# Altium PCB PCB1.PcbDoc (part 2 of 3)
Units mil, origin at the board's own origin, x right, y up, seen from the top; angles counter-clockwise.
Board outline 3935 x 3335 mil, 2 copper layers (Top Layer, Bottom Layer); 149 components, 220 nets, 928 pads, 357 vias.
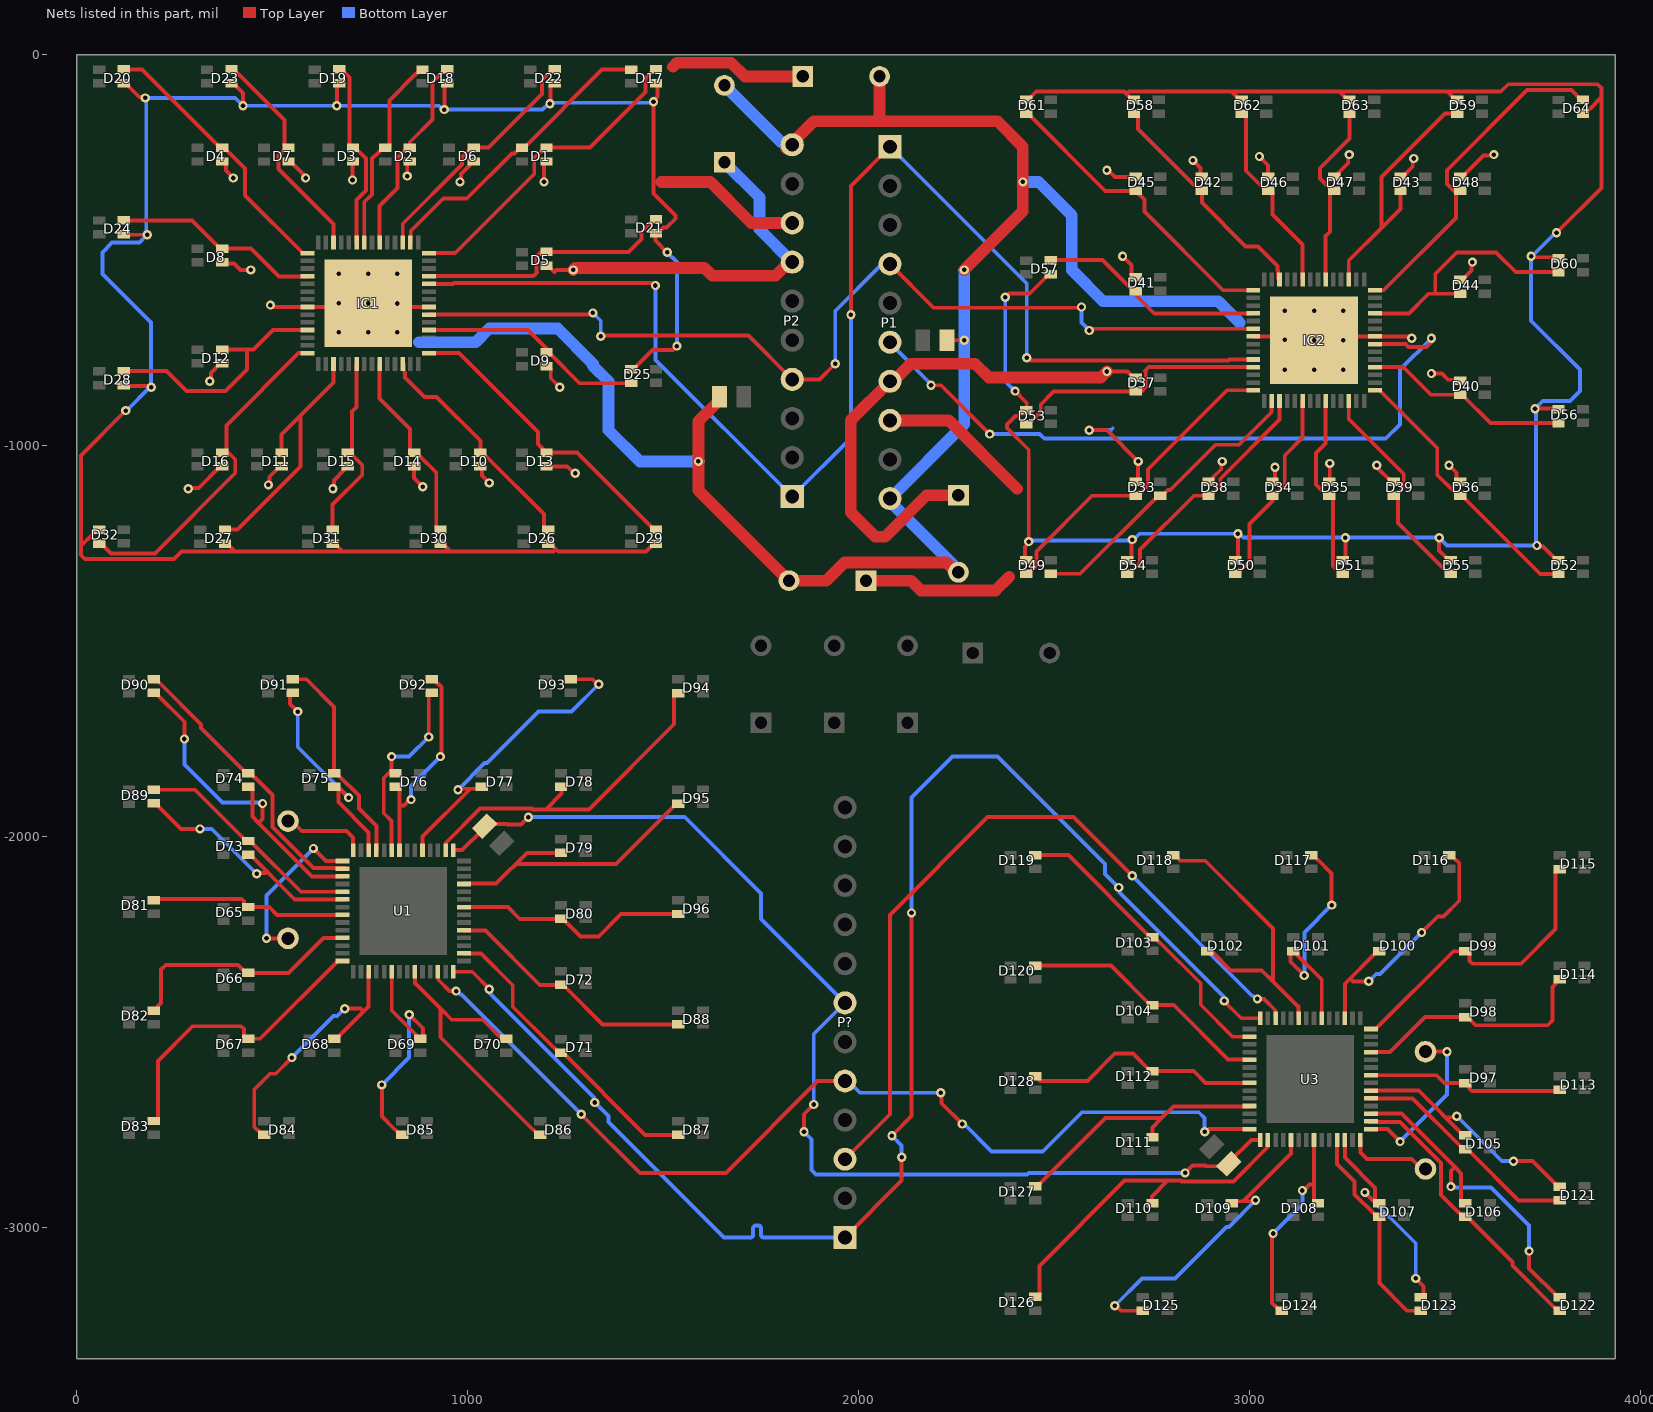
[diagram p2: the nets of this part, all layers, seen from the top]

## Via types
v1: diameter 23.62, hole 11.81, Top Layer to Bottom Layer, 357 vias

## Nets (pads, with @x,y where several pads share a name; then routed paths per layer and width w, separated by ;. In a path a pad name is that pad's centre, name@x,y a point inside that pad or via, vN(x,y) a via of type N, cw(c..) or ccw(c..) an arc to the next point about the centre after c; other vN are vias at no path point) (continued)
1_OUTG12_1: D76.2 D92.2 U1.51 | length 489.1
  Top Layer w10: U1.51@805,-2035 805,-1960 785,-1940 785,-1850 805,-1830 v1(805,-1795) ; v1(900,-1745) 900,-1638.11 905.83,-1632.28 D92.2@907.5,-1632.28
  Bottom Layer w10: v1(805,-1795) 850,-1795 v1(900,-1745)
1_OUTG13: D107.2 D123.2 U3.54 | length 564
  Top Layer w10: U3.54@3243.58,-2775.51 3243.58,-2820.83 3321.13,-2898.38 D107.2@3321.13,-2931.89 ; v1(3295,-2910) 3316.89,-2931.89 D107.2@3321.13,-2931.89 ; D107.2@3331.88,-2937.72 3326.06,-2931.89 D107.2@3321.13,-2931.89 ; v1(3425,-3130) 3445,-3150 D123.2@3445,-3175
  Bottom Layer w10: v1(3295,-2910) 3425,-3040 v1(3425,-3130)
1_OUTG13_1: D75.2 D91.2 U1.54 | length 564
  Top Layer w10: D91.2@545,-1635 545,-1660 v1(565,-1680) ; D75.2@658.12,-1872.28 663.94,-1878.11 D75.2@668.87,-1878.11 ; v1(695,-1900) 673.11,-1878.11 D75.2@668.87,-1878.11 ; U1.54@746.42,-2034.49 746.42,-1989.17 668.87,-1911.62 D75.2@668.87,-1878.11
  Bottom Layer w10: v1(565,-1680) 565,-1770 v1(695,-1900)
1_OUTG14: D106.2 D122.2 U3.3 | length 888.3
  Top Layer w10: U3.3@3310.51,-2708.58 3388.58,-2708.58 3525,-2845 ; v1(3515,-2895) 3515,-2855 3525,-2845 ; D106.2@3550,-2935 3544.37,-2935 3541.26,-2931.89 3541.26,-2861.26 3525,-2845 ; v1(3715,-3060) 3715,-3104.13 3788.58,-3177.72 D122.2@3793.5,-3177.72
  Bottom Layer w10: v1(3515,-2895) 3517.61,-2897.61 3617.61,-2897.61 3715,-2995 v1(3715,-3060)
1_OUTG14_1: D74.2 D90.2 U1.3 | length 888.3
  Top Layer w10: D90.2@196.5,-1632.28 201.42,-1632.28 275,-1705.87 v1(275,-1750) ; D74.2@440,-1875 445.63,-1875 448.74,-1878.11 448.74,-1948.74 465,-1965 ; v1(475,-1915) 475,-1955 465,-1965 ; U1.3@679.49,-2101.42 601.42,-2101.42 465,-1965
  Bottom Layer w10: v1(275,-1750) 275,-1815 372.39,-1912.39 472.39,-1912.39 v1(475,-1915)
1_OUTG15: D105.2 D121.2 U3.6 | length 659.8
  Top Layer w10: U3.6@3305,-2650 3305.47,-2649.53 U3.6@3310.51,-2649.53 3432.65,-2649.53 3547.09,-2763.97 D105.2@3552.01,-2763.97 ; 3505,-2720 3507.39,-2717.61 3527.39,-2717.61 v1(3530,-2715) ; v1(3675,-2830) 3723.37,-2830 3788.58,-2895.22 D121.2@3793.5,-2895.22
  Bottom Layer w10: v1(3530,-2715) 3645,-2830 v1(3675,-2830)
1_OUTG15_1: D73.2 D89.2 U1.6 | length 659.8
  Top Layer w10: D89.2@196.5,-1914.78 201.42,-1914.78 266.63,-1980 v1(315,-1980) ; D73.2@437.99,-2046.03 442.91,-2046.03 557.35,-2160.47 U1.6@679.49,-2160.47 684.53,-2160.47 U1.6@685,-2160 ; v1(460,-2095) 462.61,-2092.39 482.61,-2092.39 485,-2090
  Bottom Layer w10: v1(315,-1980) 345,-1980 v1(460,-2095)
1_OUTR0: D97.1 D113.1 U3.8 | length 504.1
  Top Layer w10: U3.8@3315,-2610 3315.16,-2610.16 3477.92,-2610.16 3497.98,-2630.22 D97.1@3552.01,-2630.22 ; D97.1@3550,-2630 3556.71,-2630 3562.76,-2636.04 3562.76,-2644.84 3568.96,-2651.04 3790.18,-2651.04 D113.1@3793.5,-2647.72
1_OUTR0_1: D65.1 D81.1 U1.8 | length 504.1
  Top Layer w10: D81.1@196.5,-2162.28 199.82,-2158.96 421.04,-2158.96 427.24,-2165.16 427.24,-2173.96 433.29,-2180 D65.1@440,-2180 ; D65.1@437.99,-2179.78 492.02,-2179.78 512.08,-2199.84 674.84,-2199.84 U1.8@675,-2200
1_OUTR1: D98.1 D114.1 U3.11 | length 625.9
  Top Layer w10: U3.11@3310.51,-2551.1 3358.9,-2551.1 3448.53,-2461.47 3543.53,-2461.47 D98.1@3545,-2460 ; D98.1@3552.01,-2461.47 3556.93,-2461.47 3577.76,-2482.29 3762.71,-2482.29 3775,-2470 3775,-2385 3782.76,-2377.24 3782.76,-2371.04 3788.8,-2365 D114.1@3795,-2365
1_OUTR1_1: D66.1 D82.1 U1.11 | length 625.9
  Top Layer w10: D82.1@195,-2445 201.2,-2445 207.24,-2438.96 207.24,-2432.76 215,-2425 215,-2340 227.29,-2327.71 412.24,-2327.71 433.07,-2348.53 D66.1@437.99,-2348.53 ; D66.1@445,-2350 446.47,-2348.53 541.47,-2348.53 631.1,-2258.9 U1.11@679.49,-2258.9
1_OUTR2: D99.1 D115.1 U3.14 | length 769.1
  Top Layer w10: U3.14@3310.51,-2492.05 3322.32,-2492.05 3521.26,-2293.11 D99.1@3548.11,-2293.11 ; D99.1@3555,-2295 3559.21,-2295 3562.76,-2298.54 3562.76,-2317.76 3570,-2325 3694.14,-2325 3782.76,-2236.39 3782.76,-2088.54 3788.58,-2082.72 D115.1@3793.5,-2082.72
1_OUTR2_1: D67.1 D83.1 U1.14 | length 769.1
  Top Layer w10: D83.1@196.5,-2727.28 201.42,-2727.28 207.24,-2721.46 207.24,-2573.61 295.86,-2485 420,-2485 427.24,-2492.24 427.24,-2511.46 430.79,-2515 D67.1@435,-2515 ; D67.1@441.89,-2516.89 468.74,-2516.89 667.68,-2317.95 U1.14@679.49,-2317.95
1_OUTR3: D100.1 D116.1 U3.17 | length 702.4
  Top Layer w10: U3.17@3243.58,-2464.49 3243.58,-2376.09 3325,-2294.68 D100.1@3325,-2290 ; 3260,-2365 3265,-2370 v1(3305,-2370) ; v1(3440,-2245) 3481.3,-2203.7 3496.3,-2203.7 3536.24,-2163.76 3536.24,-2067.31 3529.17,-2060.24 3528.38,-2060.24 3515.42,-2047.28 D116.1@3510.5,-2047.28
  Bottom Layer w10: v1(3305,-2370) 3323.96,-2351.04 3333.96,-2351.04 v1(3440,-2245)
1_OUTR3_1: D68.1 D84.1 U1.17 | length 702.4
  Top Layer w10: D84.1@479.5,-2762.72 474.58,-2762.72 461.62,-2749.76 460.83,-2749.76 453.76,-2742.69 453.76,-2646.24 493.7,-2606.3 508.7,-2606.3 v1(550,-2565) ; D68.1@665,-2520 665,-2515.32 746.42,-2433.91 U1.17@746.42,-2345.51 ; v1(685,-2440) 725,-2440 730,-2445
  Bottom Layer w10: v1(550,-2565) 656.04,-2458.96 666.04,-2458.96 v1(685,-2440)
1_OUTR4: D101.1 D117.1 U3.20 | length 646.8
  Top Layer w10: D101.1@3105,-2295 3105,-2320 v1(3140,-2355) ; D101.1@3111.76,-2292.72 3116.68,-2292.72 3122.5,-2298.54 3122.5,-2303.46 3184.53,-2365.49 U3.20@3184.53,-2464.49 3184.53,-2469.53 U3.20@3185,-2470 ; D117.1@3157.5,-2047.28 3162.42,-2047.28 3175.38,-2060.24 3176.17,-2060.24 3210,-2094.07 v1(3210,-2175)
  Bottom Layer w10: v1(3140,-2355) 3140,-2245 v1(3210,-2175)
1_OUTR4_1: D69.1 D85.1 U1.20 | length 646.8
  Top Layer w10: v1(780,-2635) 780,-2715.93 813.83,-2749.76 814.62,-2749.76 827.58,-2762.72 D85.1@832.5,-2762.72 ; U1.20@805,-2340 805.47,-2340.47 U1.20@805.47,-2345.51 805.47,-2444.51 867.5,-2506.54 867.5,-2511.46 873.32,-2517.28 D69.1@878.24,-2517.28 ; v1(850,-2455) 885,-2490 D69.1@885,-2515
  Bottom Layer w10: v1(780,-2635) 850,-2565 v1(850,-2455)
1_OUTR5: D102.1 D118.1 U3.23 | length 787.5
  Top Layer w10: D118.1@2804.5,-2047.28 2809.42,-2047.28 2822.38,-2060.24 2822.38,-2061.46 2886.46,-2061.46 3060,-2235 3060,-2370.85 ; D102.1@2895,-2295 2905,-2295 2951.81,-2341.81 3030.97,-2341.81 3060,-2370.85 ; U3.23@3125.47,-2464.49 3124.57,-2463.58 3124.57,-2434.57 3121.81,-2431.81 3120.97,-2431.81 3060,-2370.85
1_OUTR5_1: D70.1 D86.1 U1.23 | length 750.4
  Top Layer w10: U1.23@864.53,-2345.51 865.43,-2346.42 865.43,-2375.43 868.19,-2378.19 869.03,-2378.19 930,-2439.15 ; D70.1@1095,-2515 1085,-2515 1038.19,-2468.19 959.03,-2468.19 930,-2439.15 ; D86.1@1185.5,-2762.72 1180.58,-2762.72 1167.62,-2749.76 1166.83,-2749.76 930,-2512.93 930,-2439.15
1_OUTR6: D103.1 D119.1 U3.30 | length 777.2
  Top Layer w10: D119.1@2451.5,-2047.28 2536.57,-2047.28 2749.29,-2260 D103.1@2755,-2260 ; D103.1@2751.5,-2257.28 2756.42,-2257.28 2769.38,-2270.24 2770.17,-2270.24 2874.92,-2375 2874.92,-2429.92 2956.73,-2511.73 U3.30@2999.49,-2511.73
1_OUTR6_1: D71.1 D87.1 U1.30 | length 777.2
  Top Layer w10: U1.30@990.51,-2298.27 1033.27,-2298.27 1115.08,-2380.08 1115.08,-2435 1219.83,-2539.76 1220.62,-2539.76 1233.58,-2552.72 D71.1@1238.5,-2552.72 ; D71.1@1235,-2550 1240.71,-2550 1453.43,-2762.72 D87.1@1538.5,-2762.72
1_OUTR7: D104.1 D120.1 U3.33 | length 646.1
  Top Layer w10: D120.1@2451.5,-2329.78 2645.32,-2329.78 2745.54,-2430 D104.1@2750,-2430 ; D104.1@2751.5,-2431.03 2806.03,-2431.03 2945,-2570 U3.33@3000,-2570
1_OUTR7_1: D72.1 D88.1 U1.33 | length 646.1
  Top Layer w10: U1.33@990,-2240 1045,-2240 1183.97,-2378.97 D72.1@1238.5,-2378.97 ; D72.1@1240,-2380 1244.46,-2380 1344.68,-2480.22 D88.1@1538.5,-2480.22
1_OUTR8: D112.1 D128.1 U3.36 | length 612.4
  Top Layer w10: D128.1@2451.5,-2612.28 2464.21,-2625 2585,-2625 2655,-2555 2701.79,-2555 2746.79,-2600 D112.1@2750,-2600 ; D112.1@2751.5,-2599.78 2857.02,-2599.78 2887.08,-2629.84 U3.36@2999.49,-2629.84 2999.84,-2629.84 U3.36@3000,-2630
1_OUTR8_1: D80.1 D96.1 U1.36 | length 601.9
  Top Layer w10: U1.36@990,-2180 990.16,-2180.16 U1.36@990.51,-2180.16 1102.92,-2180.16 1132.98,-2210.22 D80.1@1238.5,-2210.22 ; D80.1@1240,-2210 1243.21,-2210 1288.21,-2255 1335,-2255 1392.28,-2197.72 D96.1@1538.5,-2197.72
1_OUTR9: D111.1 D127.1 U3.39 | length 691.6
  Top Layer w10: D127.1@2451.5,-2894.78 2456.42,-2894.78 2631.2,-2720 2775,-2720 ; D111.1@2751.5,-2768.53 2751.5,-2743.5 2775,-2720 ; U3.39@3000,-2690 2805,-2690 2775,-2720
1_OUTR9_1: D79.1 D95.1 U1.39 | length 765.7
  Top Layer w10: U1.39@990,-2120 1072.52,-2120 1151.06,-2041.47 D79.1@1238.5,-2041.47 ; 1120,-2075 1125,-2070 1378.8,-2070 1533.58,-1915.22 D95.1@1538.5,-1915.22
1_OUTR10: D110.1 D126.1 U3.44 | length 891.4
  Top Layer w10: D126.1@2451.5,-3177.28 2456.42,-3177.28 2462.24,-3171.46 2462.24,-3097.76 2680,-2880 2790,-2880 ; D110.1@2745,-2935 2746.46,-2935 2750,-2931.46 2750,-2920 2790,-2880 ; U3.44@3046.73,-2775.51 3045.83,-2776.42 3045.83,-2794.5 2958.51,-2881.81 2825.97,-2881.81 2824.15,-2880 2790,-2880
1_OUTR10_1: D78.1 D94.1 U1.44 | length 891.4
  Top Layer w10: U1.44@943.27,-2034.49 944.17,-2033.58 944.17,-2015.5 1031.49,-1928.19 1164.03,-1928.19 1165.85,-1930 1200,-1930 ; D78.1@1245,-1875 1243.54,-1875 1240,-1878.54 1240,-1890 1200,-1930 ; D94.1@1538.5,-1632.72 1533.58,-1632.72 1527.76,-1638.54 1527.76,-1712.24 1310,-1930 1200,-1930
1_OUTR11: D109.1 D125.1 U3.47 | length 823.4
  Top Layer w10: v1(2655,-3200) 2658.69,-3200 2671.4,-3212.72 D125.1@2727,-3212.72 2727.72,-3212.72 D125.1@2730,-3215 ; D109.1@2954.62,-2937.28 2959.3,-2932.61 3012.39,-2932.61 v1(3015,-2930) ; 2984.76,-2931.46 3105.79,-2810.43 3105.79,-2775.79 U3.47@3105,-2775
  Bottom Layer w10: v1(2655,-3200) 2725,-3130 2809.15,-3130 2940.97,-2998.19 2946.81,-2998.19 v1(3015,-2930)
1_OUTR11_1: D77.1 D93.1 U1.47 | length 823.4
  Top Layer w10: U1.47@885,-2035 884.21,-2034.21 884.21,-1999.57 1005.24,-1878.54 ; v1(975,-1880) 977.61,-1877.39 1030.7,-1877.39 D77.1@1035.38,-1872.72 ; D93.1@1260,-1595 1262.28,-1597.28 D93.1@1263,-1597.28 1318.6,-1597.28 1331.31,-1610 v1(1335,-1610)
  Bottom Layer w10: v1(975,-1880) 1043.19,-1811.81 1049.03,-1811.81 1180.85,-1680 1265,-1680 v1(1335,-1610)
1_OUTR12: D108.1 D124.1 U3.50 | length 558.6
  Top Layer w10: v1(3060,-3015) 3060,-3018.69 3056.76,-3021.93 3056.76,-3192.69 3063.83,-3199.76 3064.62,-3199.76 3077.58,-3212.72 D124.1@3082.5,-3212.72 ; v1(3135,-2905) 3138.69,-2905 3153.69,-2890 3164.84,-2890 ; U3.50@3164.84,-2775.51 3164.84,-2890 ; 3165,-2890 3164.84,-2890 ; D108.1@3174.75,-2937.28 3170.67,-2937.28 3164.84,-2931.46 3164.84,-2890
  Bottom Layer w10: v1(3060,-3015) 3135,-2940 v1(3135,-2905)
1_OUTR12_1: D76.1 D92.1 U1.50 | length 558.6
  Top Layer w10: D76.1@815.25,-1872.72 819.33,-1872.72 825.16,-1878.54 825.16,-1920 ; 825,-1920 825.16,-1920 ; U1.50@825.16,-2034.49 825.16,-1920 ; v1(855,-1905) 851.31,-1905 836.31,-1920 825.16,-1920 ; D92.1@907.5,-1597.28 912.42,-1597.28 925.38,-1610.24 926.17,-1610.24 933.24,-1617.31 933.24,-1788.07 930,-1791.31 v1(930,-1795)
  Bottom Layer w10: v1(855,-1905) 855,-1870 v1(930,-1795)
1_OUTR13: D107.1 D123.1 U3.53 | length 552.1
  Top Layer w10: U3.53@3223.9,-2775.51 3223.9,-2837.68 3268.4,-2882.18 3268.4,-2914.95 3320.34,-2966.89 3321.89,-2966.89 D107.1@3330,-2975 ; D107.1@3331.88,-2972.72 3331.88,-3141.88 3402.72,-3212.72 3437.28,-3212.72 D123.1@3440,-3210
1_OUTR13_1: D75.1 D91.1 U1.53 | length 552.1
  Top Layer w10: D91.1@550,-1600 552.72,-1597.28 587.28,-1597.28 658.12,-1668.12 D75.1@658.12,-1837.28 ; D75.1@660,-1835 668.11,-1843.11 669.66,-1843.11 721.6,-1895.05 721.6,-1927.82 766.1,-1972.32 U1.53@766.1,-2034.49
1_OUTR14: D106.1 D122.1 U3.2 | length 743.9
  Top Layer w10: U3.2@3305,-2730 3385,-2730 3490,-2835 3490,-2916.43 3533.33,-2959.76 3534.13,-2959.76 3547.09,-2972.72 D106.1@3552.01,-2972.72 3556.93,-2972.72 3672.36,-3088.15 3672.36,-3097.29 3781.96,-3206.89 3786.89,-3206.89 D122.1@3795,-3215
1_OUTR14_1: D74.1 D90.1 U1.2 | length 743.9
  Top Layer w10: D90.1@195,-1595 203.11,-1603.11 208.04,-1603.11 317.64,-1712.71 317.64,-1721.85 433.07,-1837.28 D74.1@437.99,-1837.28 442.91,-1837.28 455.87,-1850.24 456.67,-1850.24 500,-1893.57 500,-1975 605,-2080 U1.2@685,-2080
1_OUTR15: D105.1 D121.1 U3.5 | length 598.5
  Top Layer w10: U3.5@3305,-2670 3305.79,-2669.21 U3.5@3310.51,-2669.21 3416.54,-2669.21 3540.46,-2793.14 3546.18,-2793.14 D105.1@3552.01,-2798.97 ; D105.1@3550,-2800 3557.96,-2800 3688.18,-2930.22 D121.1@3793.5,-2930.22
1_OUTR15_1: D73.1 D89.1 U1.5 | length 598.5
  Top Layer w10: D89.1@196.5,-1879.78 301.82,-1879.78 432.04,-2010 D73.1@440,-2010 ; D73.1@437.99,-2011.03 443.82,-2016.86 449.54,-2016.86 573.46,-2140.79 U1.5@679.49,-2140.79 684.21,-2140.79 U1.5@685,-2140
1_SCLK: P?.1 U1.28 U3.28 | length 3808.3
  Top Layer w10: U1.28@962.95,-2345.51 1011.36,-2345.51 1055,-2389.15 v1(1055,-2390) ; P?.1@1965,-3025 2110,-2880 v1(2110,-2820) ; v1(2085,-2765) 2135,-2715 v1(2135,-2195) ; v1(2935,-2420) 2935,-2420.85 2978.64,-2464.49 U3.28@3027.05,-2464.49
  Bottom Layer w10: v1(1055,-2390) 1055,-2400 1322.39,-2667.39 1322.39,-2677.39 v1(1325,-2680) 1360,-2715 1360,-2730 1655,-3025 1720,-3025 1723,-3025 ccw(c1723,-3018) 1730,-3018 1730,-3002 cw(c1737,-3002) 1737,-2995 1743,-2995 cw(c1743,-3002) 1750,-3002 1750,-3018 ccw(c1757,-3018) 1757,-3025 1765,-3025 P?.1@1965,-3025 ; v1(2085,-2765) 2110,-2790 v1(2110,-2820) ; v1(2135,-2195) 2135,-1900 2240,-1795 2355,-1795 2630,-2070 2630,-2095 v1(2665,-2130) 2667.61,-2132.61 2667.61,-2142.61 2935,-2410 v1(2935,-2420)
1_SIN: P?.3 U3.26 | length 1990.6
  Top Layer w10: P?.3@1960,-2820 1970,-2820 2080,-2710 2080,-2200 2330,-1950 2550,-1950 v1(2700,-2100) ; v1(3020,-2414.96) 3036.5,-2414.96 3065.51,-2443.98 3065.51,-2463.58 U3.26@3066.42,-2464.49
  Bottom Layer w10: v1(2700,-2100) 2700,-2100.85 3005.97,-2406.81 3008.16,-2406.81 3016.31,-2414.96 v1(3020,-2414.96)
1_SOUT: P?.5 U1.26 U3.42 | length 2580.2
  Top Layer w10: U1.26@923.58,-2345.51 924.49,-2346.42 924.49,-2366.02 953.5,-2395.04 v1(970,-2395.04) ; v1(1290,-2710) 1440,-2860 1660,-2860 1895,-2625 P?.5@1965,-2625 P?.5@1970,-2630 ; v1(2210,-2655) 2211.81,-2656.81 2211.81,-2681.81 v1(2265,-2735) ; v1(2885,-2755) 2888.69,-2755 2895.73,-2747.95 U3.42@2999.49,-2747.95
  Bottom Layer w10: v1(970,-2395.04) 973.69,-2395.04 981.84,-2403.19 984.03,-2403.19 1290,-2709.15 v1(1290,-2710) ; P?.5@1965,-2625 1973.18,-2625 2003.18,-2655 v1(2210,-2655) ; v1(2265,-2735) 2270,-2735 2340,-2805 2470.85,-2805 2570.85,-2705 2870,-2705 2885,-2720 v1(2885,-2755)
1_VCC: C9.2 C12.2 P?.7 U1.43 U3.43 | length 2936.1
  Top Layer w10: U1.43@962.95,-2034.49 985.51,-2034.49 C12.2@1040,-1980 ; C12.2@1043.01,-1973.01 1048.99,-1967.02 1101.38,-1967.02 1103.31,-1968.96 1136.04,-1968.96 v1(1155,-1950) ; v1(1860,-2755) 1860,-2710 v1(1885,-2685) ; v1(2835,-2860) 2853.96,-2841.04 2886.69,-2841.04 2888.62,-2842.98 2941.01,-2842.98 C9.2@2946.99,-2836.99 ; C9.2@2950,-2830 3004.49,-2775.51 U3.43@3027.05,-2775.51
  Bottom Layer w10: v1(1155,-1950) 1555,-1950 1750,-2145 1750,-2210 1955,-2415 P?.7@1955,-2430 ; v1(1860,-2755) 1878.96,-2773.96 1878.96,-2853.01 1890.47,-2864.53 2430.47,-2864.53 2435,-2860 v1(2835,-2860) ; v1(1885,-2685) 1885,-2505 1960,-2430 P?.7@1970,-2430
+VIN_1: C4.1 D1.4 D2.4 D3.4 D4.4 D5.4 D6.4 D7.4 D8.4 D9.4 D10.4 D11.4 D12.4 D13.4 D14.4 D15.4 D16.4 P2.7 | length 2002.9
  Top Layer w10: v1(285,-1110) 287.52,-1107.48 311.81,-1107.48 366.57,-1052.72 D16.4@371.5,-1052.72 ; v1(340,-835) 342.61,-832.39 342.61,-813.35 366.57,-789.38 D12.4@371.5,-789.38 ; D8.4@371.5,-531.05 374.5,-534.06 402.24,-534.06 418.19,-550 v1(445,-550) ; D4.4@371.5,-272.72 375.22,-272.72 381.04,-278.54 381.04,-296.04 v1(400,-315) ; v1(490,-1100) 492.61,-1097.39 492.61,-1079.08 518.97,-1052.72 D11.4@523.9,-1052.72 ; D7.4@541.5,-272.72 546.42,-272.72 582.39,-308.69 582.39,-312.39 v1(585,-315) ; v1(655,-1110) 657.61,-1107.39 657.61,-1088.41 682.55,-1063.46 682.55,-1058.54 688.37,-1052.72 D15.4@693.3,-1052.72 ; v1(705,-320) 705,-274.21 D3.4@706.5,-272.72 ; v1(845,-310) 845,-278.54 850.83,-272.72 D2.4@851.5,-272.72 ; D14.4@862.7,-1052.72 862.7,-1082.7 v1(885,-1105) ; v1(980,-325) 982.61,-322.39 982.61,-305.11 1004.25,-283.46 1004.25,-278.54 1010.08,-272.72 D6.4@1015,-272.72 ; D10.4@1032.1,-1052.72 1036.04,-1056.66 1036.04,-1076.04 v1(1055,-1095) ; v1(1195,-325) 1195,-278.54 1200.83,-272.72 D1.4@1201.5,-272.72 ; D13.4@1201.5,-1052.72 1254.37,-1052.72 1271.65,-1070 v1(1275,-1070) ; D9.4@1201.5,-796.05 1206.42,-796.05 1212.24,-801.88 1212.24,-827.24 v1(1235,-850) ; D5.4@1206.19,-534.69 D5.4@1201.5,-539.38 1206.42,-539.38 1222.03,-555 1227.03,-550 v1(1270,-550) ; P2.7@1825.31,-534.69 P2.7@1830,-530
  Top Layer w30: v1(1270,-550) 1275,-545 1605,-545 1625,-565 1787.14,-565 1822.14,-530 P2.7@1830,-530
  Bottom Layer w30: C4.1@1656.46,-274.89 1746.24,-364.67 1746.24,-446.24 P2.7@1830,-530 P2.7@1830,-540
+VIN_1_1: C1.1 D33.4 D34.4 D35.4 D36.4 D37.4 D38.4 D39.4 D40.4 D41.4 D42.4 D43.4 D44.4 D45.4 D46.4 D47.4 D48.4 P1.7 | length 2625.3
  Top Layer w10: v1(2590,-960) 2635,-960 v1(2715,-1040) 2715,-1086.46 2709.17,-1092.28 D33.4@2708.5,-1092.28 ; v1(2635,-810) 2687.97,-810 2703.58,-825.62 D37.4@2708.5,-825.62 D37.4@2703.81,-830.31 ; v1(2635,-295) 2638.35,-295 2655.63,-312.28 D45.4@2708.5,-312.28 ; v1(2675,-515) 2697.76,-537.76 2697.76,-563.12 2703.58,-568.95 D41.4@2708.5,-568.95 ; v1(2855,-270) 2873.96,-288.96 2873.96,-308.34 D42.4@2877.9,-312.28 ; D38.4@2895,-1092.28 2899.92,-1092.28 2905.75,-1086.46 2905.75,-1081.54 2927.39,-1059.89 2927.39,-1042.61 v1(2930,-1040) ; v1(3025,-260) 3047.3,-282.3 D46.4@3047.3,-312.28 ; D34.4@3058.5,-1092.28 3059.17,-1092.28 3065,-1086.46 v1(3065,-1055) ; D35.4@3203.5,-1092.28 3205,-1090.79 v1(3205,-1045) ; D47.4@3216.7,-312.28 3221.63,-312.28 3227.45,-306.46 3227.45,-301.54 3252.39,-276.59 3252.39,-257.61 v1(3255,-255) ; v1(3325,-1050) 3327.61,-1052.61 3327.61,-1056.31 3363.58,-1092.28 D39.4@3368.5,-1092.28 ; D43.4@3386.1,-312.28 3391.03,-312.28 3417.39,-285.92 3417.39,-267.61 v1(3420,-265) ; v1(3465,-815) 3491.81,-815 3507.76,-830.94 3535.5,-830.94 D40.4@3538.5,-833.95 ; v1(3510,-1050) 3528.96,-1068.96 3528.96,-1086.46 3534.78,-1092.28 D36.4@3538.5,-1092.28 ; D44.4@3538.5,-575.62 3543.43,-575.62 3567.39,-551.65 3567.39,-532.61 v1(3570,-530) ; D48.4@3538.5,-312.28 3543.43,-312.28 3598.19,-257.52 3622.48,-257.52 v1(3625,-255)
  Top Layer w30: P1.7@2085,-825 2085,-830 P1.7@2080,-835 ; C1.1@2255,-1126.57 2173.43,-1126.57 2067.43,-1232.57 2042.57,-1232.57 1980,-1170 1980,-935 P1.7@2080,-835 ; v1(2635,-810) 2620,-825 2332.5,-825 2297.5,-790 2132.86,-790 2087.86,-835 P1.7@2080,-835
  Bottom Layer w10: v1(2590,-960) 2645,-960 2650,-955
+VIN_2: C5.1 D17.4 D18.4 D19.4 D20.4 D21.4 D22.4 D23.4 D24.4 D25.4 D26.4 D27.4 D28.4 D29.4 D30.4 D31.4 D32.4 P2.8 | length 6483.1
  Top Layer w10: 13.15,-1253.15 37.12,-1229.17 37.48,-1229.17 51.65,-1215 D32.4@55,-1215 ; D28.4@120,-840 127.39,-847.39 187.39,-847.39 v1(190,-850) ; D24.4@120,-458.62 121.38,-460 v1(180,-460) ; D20.4@120,-72.72 124.92,-72.72 159.6,-107.39 172.39,-107.39 v1(175,-110) ; v1(125,-910) 10,-1025 10,-1280 20,-1290 248.27,-1290 267.44,-1270.83 404.45,-1270.83 ; D27.4@380,-1255 388.62,-1255 404.45,-1270.83 ; D23.4@395.7,-72.72 400.62,-72.72 425,-97.1 v1(425,-130) ; D31.4@654.4,-1250 659.32,-1250 680.15,-1270.83 ; v1(665,-130) 665,-78.54 670.83,-72.72 D19.4@671.4,-72.72 ; D30.4@930.1,-1250 935.02,-1250 955.85,-1270.83 ; v1(940,-140) 940,-78.54 945.83,-72.72 D18.4@947.1,-72.72 ; D26.4@1205,-1250 1210.72,-1250 1225.36,-1264.64 ; v1(1210,-125) 1212.05,-122.95 1212.05,-78.54 1220.59,-70 D22.4@1225,-70 ; D25.4@1418.5,-803.95 1423.43,-803.95 1472.37,-755 1525,-755 v1(1535,-745) ; D21.4@1480,-450 1480,-475 v1(1510,-505) ; D29.4@1481.5,-1250 1476.57,-1250 1455.75,-1270.83 1231.54,-1270.83 1225.36,-1264.64 ; D21.4@1481.5,-455 1487.47,-455 1501.02,-441.44 1508.56,-441.44 1530.86,-419.14 1530.86,-410.86 1475,-355 v1(1475,-120) 1475,-116.31 1485,-106.31 D17.4@1485,-75 ; 404.45,-1270.83 680.15,-1270.83 ; 680.15,-1270.83 955.85,-1270.83 ; 955.85,-1270.83 1219.17,-1270.83 1225.36,-1264.64
  Top Layer w30: 1495,-325 1620,-325 1725,-430 P2.8@1830,-430 ; 1525,-30 1535,-20 1673.29,-20 1708.29,-55 C5.1@1856.57,-55
  Bottom Layer w10: v1(125,-910) 127.5,-910 187.5,-850 v1(190,-850) 190,-685 65,-560 65,-505 90,-480 160,-480 v1(180,-460) 177.5,-457.5 177.5,-116.29 176.21,-115 v1@175,-115 ; v1(175,-110) 405,-110 v1(425,-130) v1(665,-130) 926.31,-130 936.31,-140 v1(940,-140) 1191.31,-140 1206.31,-125 v1(1210,-125) 1212.5,-122.5 1472.5,-122.5 v1(1475,-120) ; v1(1510,-505) 1535,-530 v1(1535,-745)
+VIN_2_1: C2.1 D49.4 D50.4 D51.4 D52.4 D53.4 D54.4 D55.4 D56.4 D57.4 D58.4 D59.4 D60.4 D61.4 D62.4 D63.4 D64.4 P1.8 | length 6543.3
  Top Layer w10: v1(2375,-620) 2385,-610 2437.63,-610 2486.57,-561.05 D57.4@2491.5,-561.05 ; v1(2400,-860) 2430,-890 D53.4@2430,-915 ; D49.4@2425,-1290 2425,-1258.69 2435,-1248.69 v1(2435,-1245) 2435,-1010 2379.14,-954.14 2379.14,-945.86 2401.44,-923.56 2408.98,-923.56 2422.53,-910 D53.4@2428.5,-910 ; D61.4@2428.5,-115 2433.43,-115 2454.25,-94.17 2678.46,-94.17 2684.64,-100.36 ; D54.4@2685,-1295 2689.41,-1295 2697.95,-1286.46 2697.95,-1242.05 v1(2700,-1240) ; D58.4@2705,-115 2699.28,-115 2684.64,-100.36 ; D50.4@2962.9,-1292.28 2964.17,-1292.28 2970,-1286.46 v1(2970,-1225) ; D62.4@2979.9,-115 2974.98,-115 2954.15,-94.17 ; D51.4@3238.6,-1292.28 3239.17,-1292.28 3245,-1286.46 v1(3245,-1235) ; D63.4@3255.6,-115 3250.68,-115 3229.85,-94.17 ; v1(3485,-1235) 3485,-1267.9 3509.38,-1292.28 D55.4@3514.3,-1292.28 ; D59.4@3530,-110 3521.38,-110 3505.55,-94.17 ; v1(3720,-515) 3722.61,-517.61 3782.61,-517.61 D60.4@3790,-525 ; v1(3730,-905) 3788.62,-905 D56.4@3790,-906.38 ; v1(3735,-1255) 3737.61,-1257.61 3750.4,-1257.61 3785.08,-1292.28 D52.4@3790,-1292.28 ; v1(3785,-455) 3900,-340 3900,-85 3890,-75 3661.73,-75 3642.56,-94.17 3505.55,-94.17 ; D64.4@3855,-150 3858.35,-150 3872.52,-135.83 3872.88,-135.83 3896.85,-111.85 ; 2684.64,-100.36 2690.83,-94.17 2954.15,-94.17 ; 2954.15,-94.17 3229.85,-94.17 ; 3229.85,-94.17 3505.55,-94.17
  Top Layer w30: C2.1@2018.43,-1345 2133.86,-1345 2158.86,-1370 2350,-1370 2385,-1335 ; P1.8@2080,-935 2230,-935 2405,-1110
  Bottom Layer w10: v1(2375,-620) 2375,-835 v1(2400,-860) ; v1(2435,-1245) 2437.5,-1242.5 2697.5,-1242.5 v1(2700,-1240) 2703.69,-1240 2718.69,-1225 v1(2970,-1225) 2973.69,-1225 2983.69,-1235 v1(3245,-1235) v1(3485,-1235) 3505,-1255 v1(3735,-1255) ; v1@3735,-1250 3733.79,-1250 3732.5,-1248.71 3732.5,-907.5 v1(3730,-905) 3750,-885 3820,-885 3845,-860 3845,-805 3720,-680 v1(3720,-515) 3722.5,-515 3782.5,-455 v1(3785,-455)
Error_Read: IC2.7 P1.6 | length 1833.7
  Top Layer w10: v1(2185,-845) 2210,-845 v1(2335,-970) ; IC2.7@3320.51,-739.84 3399,-739.84 3405.97,-746.81 3453.19,-746.81 3465,-735 v1(3465,-725)
  Bottom Layer w10: P1.6@2085,-740 2085,-742.5 2185,-842.5 v1(2185,-845) ; v1(2335,-970) 2462.95,-970 2474.77,-981.81 3348.19,-981.81 3385,-945 3385,-805 v1(3465,-725)
GND: C1.2 C2.2 C3.1 C4.2 C5.2 C6.1 IC1.8 IC1.35 IC1.57 IC2.8 IC2.35 IC2.57 P1.10 P2.10 | length 5987.4
  Top Layer w10: v1(495,-640) 498.69,-640 503.53,-644.84 735.16,-644.84 v1(745,-635) 754.84,-644.84 IC1.35@900.51,-644.84 ; 2045,-180 2053.43,-171.57 2053.43,-170 ; C3.1@2226.1,-730 v1(2270,-730) ; IC2.35@3009.49,-720.16 3009.65,-720 3155,-720 v1(3165,-730) 3174.84,-720.16 3406.47,-720.16 3411.31,-725 v1(3415,-725)
  Top Layer w30: C6.1@1640,-870 1640,-887.36 1590,-937.36 v1(1590,-1040) 1590,-1113.43 C2.2@1821.57,-1345 1917.27,-1345 1963.85,-1298.43 2223.74,-1298.43 2250,-1324.69 C1.2@2250,-1325 ; P2.10@1815,-240 1885,-170 2053.43,-170 ; C5.2@2053.43,-55 2053.43,-170 ; v1(2270,-550) 2420,-400 v1(2420,-325) 2420,-235 2355,-170 2053.43,-170
  Bottom Layer w30: 875,-735 1020,-735 1055,-700 1230,-700 1320,-790 1320,-795 1360,-835 1360,-960 1440,-1040 v1(1590,-1040) ; C4.2@1656.46,-78.04 1802.87,-224.44 1816.58,-224.44 1825,-232.86 P2.10@1825,-240 ; P1.10@2080,-1135 2270,-945 v1(2270,-730) v1(2270,-550) ; P1.10@2085,-1135 2085,-1147.16 2255,-1317.16 C1.2@2255,-1323.43 ; v1(2420,-325) 2460,-325 2545,-410 2545,-550 2625,-630 2920,-630 2975,-685
  other v1: 3090,-805 3165,-805 3240,-805 3240,-730 3090,-729 670,-710 745,-710 820,-710 3090,-655 3165,-655 3240,-655 820,-636 670,-635 670,-560 745,-560 820,-560
GSCLK: IC1.34 IC2.34 P1.4 P2.4 | length 2511.1
  Top Layer w10: IC1.34@900,-665 IC1.34@900.51,-664.53 ; IC1.34@900.51,-664.53 1311.79,-664.53 1316.31,-660 v1(1320,-660) ; v1(1340,-720) 1341.81,-718.19 1718.19,-718.19 P2.4@1830,-830 1900,-830 v1(1940,-790) ; P1.4@2080,-535 2191.81,-646.81 2568.19,-646.81 v1(2570,-645) ; v1(2590,-705) 2593.69,-705 2598.21,-700.47 IC2.34@3009.49,-700.47 IC2.34@3010,-700
  Bottom Layer w10: v1(1320,-660) 1340,-680 v1(1340,-720) ; v1(1940,-790) 1940,-655 2054.57,-540.43 2079.57,-540.43 P1.4@2085,-535 ; v1(2570,-645) 2570,-685 v1(2590,-705)
LAT: IC1.38 IC2.38 P1.1 P2.1 | length 3529
  Top Layer w10: IC1.38@900.51,-585.79 961.88,-585.79 964.48,-583.19 1469.5,-583.19 ; v1(1980,-665) 1980,-335 P1.1@2080,-235 ; v1(2430,-775) 2433.69,-775 2440.5,-781.81 2945.52,-781.81 2948.12,-779.21 IC2.38@3009.49,-779.21
  Bottom Layer w10: v1(1480,-590) 1480,-780 P2.1@1830,-1130 ; P2.1@1825,-1135 P2.1@1830,-1130 ; v1(1980,-665) 1980,-980 P2.1@1830,-1130 ; P1.1@2080,-235 2430,-585 v1(2430,-775)
NetIC3_1: R2.1 U3.1 | length 429.5
  Top Layer w10: U3.1@3310.51,-2747.95 3352.95,-2747.95 v1(3385,-2780) ; R2.1@3445,-2555 R2.1@3450,-2550 v1(3505,-2550)
  Bottom Layer w10: v1(3385,-2780) 3505,-2660 v1(3505,-2550)
NetIC3_56: R2.2 U3.56 | length 221.9
  Top Layer w10: U3.56@3282.95,-2775.51 3283.23,-2775.79 3283.23,-2808.23 3300,-2825 3414.81,-2825 3439.81,-2850 R2.2@3450,-2850 R2.2@3455,-2850
NetR1_1: R1.1 U1.1 | length 429.5
  Top Layer w10: v1(485,-2260) R1.1@540,-2260 R1.1@545,-2255 ; v1(605,-2030) 637.05,-2062.05 U1.1@679.49,-2062.05
  Bottom Layer w10: v1(485,-2260) 485,-2150 v1(605,-2030)
NetR1_2: R1.2 U1.56 | length 221.9
  Top Layer w10: R1.2@535,-1960 R1.2@540,-1960 550.19,-1960 575.19,-1985 690,-1985 706.77,-2001.77 706.77,-2034.21 U1.56@707.05,-2034.49
OUTB0: D1.3 D17.3 IC1.42 | length 821.3
  Top Layer w10: IC1.42@900.51,-507.05 967.95,-507.05 1170,-305 1170,-263.49 1181.61,-251.89 1181.97,-251.89 1196.57,-237.28 D1.3@1201.5,-237.28 1312.72,-237.28 1455,-95 1455,-58.49 1462.07,-51.42 1462.43,-51.42 1476.57,-37.28 D17.3@1481.5,-37.28
OUTB0_1: D33.3 D49.3 IC2.42 | length 821.3
  Top Layer w10: D49.3@2428.5,-1327.72 2433.43,-1327.72 2447.57,-1313.58 2447.93,-1313.58 2455,-1306.51 2455,-1270 2597.28,-1127.72 D33.3@2708.5,-1127.72 2713.43,-1127.72 2728.03,-1113.11 2728.39,-1113.11 2740,-1101.51 2740,-1060 2942.05,-857.95 IC2.42@3009.49,-857.95
OUTB1: D2.3 D18.3 IC1.48 | length 519.9
  Top Layer w10: IC1.48@774.53,-479.49 774.53,-386.09 820,-340.62 820,-263.49 832.82,-250.68 833.18,-250.68 846.57,-237.28 D2.3@851.5,-237.28 851.5,-223.5 909.85,-165.15 909.85,-69.24 928.42,-50.68 928.78,-50.68 942.18,-37.28 D18.3@947.1,-37.28
OUTB1_1: D34.3 D50.3 IC2.48 | length 519.9
  Top Layer w10: D50.3@2962.9,-1327.72 2967.82,-1327.72 2981.22,-1314.32 2981.58,-1314.32 3000.15,-1295.76 3000.15,-1199.85 3058.5,-1141.5 D34.3@3058.5,-1127.72 3063.43,-1127.72 3076.82,-1114.32 3077.18,-1114.32 3090,-1101.51 3090,-1024.38 3135.47,-978.91 IC2.48@3135.47,-885.51
OUTB2: D3.3 D19.3 IC1.51 | length 489
  Top Layer w10: D19.3@671.4,-37.28 676.32,-37.28 689.71,-50.68 690.08,-50.68 697.15,-57.75 697.15,-231.46 702.97,-237.28 D3.3@706.5,-237.28 711.42,-237.28 724.81,-250.68 725.17,-250.68 740,-265.5 740,-346.57 715.47,-371.1 IC1.51@715.47,-479.49
OUTB2_1: D35.3 D51.3 IC2.51 | length 489
  Top Layer w10: IC2.51@3194.53,-885.51 3194.53,-993.9 3170,-1018.43 3170,-1099.5 3184.83,-1114.32 3185.19,-1114.32 3198.58,-1127.72 D35.3@3203.5,-1127.72 3207.03,-1127.72 3212.85,-1133.54 3212.85,-1307.25 3219.92,-1314.32 3220.29,-1314.32 3233.68,-1327.72 D51.3@3238.6,-1327.72
OUTB3: D4.3 D20.3 IC1.1 | length 704.4
  Top Layer w10: D20.3@120,-37.28 166.57,-37.28 366.57,-237.28 D4.3@371.5,-237.28 376.42,-237.28 391.02,-251.89 391.39,-251.89 430,-290.5 430,-359.37 577.68,-507.05 IC1.1@589.49,-507.05
OUTB3_1: D36.3 D52.3 IC2.1 | length 704.4
  Top Layer w10: IC2.1@3320.51,-857.95 3332.32,-857.95 3480,-1005.63 3480,-1074.5 3518.61,-1113.11 3518.98,-1113.11 3533.58,-1127.72 D36.3@3538.5,-1127.72 3543.43,-1127.72 3743.43,-1327.72 D52.3@3790,-1327.72
OUTB4: D5.3 D21.3 IC1.39 | length 679.1
  Top Layer w10: IC1.39@900.51,-566.1 1168.04,-566.1 1177.77,-556.37 1175.75,-554.35 1175.75,-515 1186.8,-503.95 D5.3@1201.5,-503.95 1411.32,-503.95 1444.25,-471.02 1444.25,-452.58 1462.82,-434.01 1463.18,-434.01 1476.57,-420.62 D21.3@1481.5,-420.62
OUTB4_1: D37.3 D53.3 IC2.39 | length 679.1
  Top Layer w10: D53.3@2428.5,-944.38 2433.43,-944.38 2446.82,-930.99 2447.18,-930.99 2465.75,-912.42 2465.75,-893.98 2498.68,-861.05 D37.3@2708.5,-861.05 2723.2,-861.05 2734.25,-850 2734.25,-810.65 2732.23,-808.63 2741.96,-798.9 IC2.39@3009.49,-798.9
OUTB5: D6.3 D22.3 IC1.45 | length 631.7
  Top Layer w10: IC1.45@833.58,-479.49 833.58,-431.86 985,-280.44 985,-262 995.11,-251.89 995.47,-251.89 1010.08,-237.28 D6.3@1015,-237.28 1052.72,-237.28 1190,-100 1190,-64.8 1202.91,-51.89 1203.27,-51.89 1217.88,-37.28 D22.3@1222.8,-37.28
OUTB5_1: D38.3 D54.3 IC2.45 | length 631.7
  Top Layer w10: D54.3@2687.2,-1327.72 2692.12,-1327.72 2706.73,-1313.11 2707.09,-1313.11 2720,-1300.2 2720,-1265 2857.28,-1127.72 D38.3@2895,-1127.72 2899.92,-1127.72 2914.53,-1113.11 2914.89,-1113.11 2925,-1103 2925,-1084.56 3076.42,-933.14 IC2.45@3076.42,-885.51
OUTB6: D7.3 D23.3 IC1.54 | length 570.8
  Top Layer w10: D23.3@395.7,-37.28 400.62,-37.28 414.01,-50.68 414.38,-50.68 530.75,-167.05 530.75,-231.46 536.57,-237.28 523.18,-250.68 522.82,-250.68 515.75,-257.75 515.75,-292.38 656.42,-433.05 IC1.54@656.42,-479.49
OUTB6_1: D39.3 D55.3 IC2.54 | length 570.8
  Top Layer w10: IC2.54@3253.58,-885.51 3253.58,-931.95 3394.25,-1072.62 3394.25,-1107.25 3387.18,-1114.32 3386.82,-1114.32 3373.43,-1127.72 3379.25,-1133.54 3379.25,-1197.95 3495.62,-1314.32 3495.99,-1314.32 3509.38,-1327.72 D55.3@3514.3,-1327.72
OUTB7: D8.3 D24.3 IC1.4 | length 529.4
  Top Layer w10: D24.3@120,-423.19 294.15,-423.19 366.57,-495.62 D8.3@371.5,-495.62 445.62,-495.62 517.01,-567.01 588.58,-567.01 IC1.4@589.49,-566.1
OUTB7_1: D40.3 D56.3 IC2.4 | length 529.4
  Top Layer w10: IC2.4@3320.51,-798.9 3321.42,-797.99 3392.99,-797.99 3464.38,-869.38 D40.3@3538.5,-869.38 3543.43,-869.38 3615.85,-941.81 D56.3@3790,-941.81
OUTB8: D9.3 D25.3 IC1.32 | length 580
  Top Layer w10: IC1.32@900.51,-703.9 1153.9,-703.9 1201.5,-751.5 D9.3@1201.5,-760.62 1207.32,-766.44 1212.61,-766.44 1286.16,-840 1417.89,-840 D25.3@1418.5,-839.38
OUTB8_1: D41.3 D57.3 IC2.32 | length 580
  Top Layer w10: D57.3@2491.5,-525.62 2492.11,-525 2623.84,-525 2697.39,-598.56 2702.68,-598.56 D41.3@2708.5,-604.38 2708.5,-613.5 2756.1,-661.1 IC2.32@3009.49,-661.1
OUTB9: D10.3 D26.3 IC1.26 | length 603.6
  Top Layer w10: IC1.26@833.58,-790.51 834.49,-791.42 836.42,-791.42 837.36,-792.36 837.36,-812.37 839.17,-814.18 839.17,-825.39 888.79,-875 920,-875 1032.1,-987.1 D10.3@1032.1,-1017.28 1037.02,-1017.28 1050.41,-1030.68 1050.77,-1030.68 1195.05,-1174.95 1195.05,-1208.74 1200.87,-1214.57 D26.3@1205.8,-1214.57
OUTB9_1: D42.3 D58.3 IC2.26 | length 603.6
  Top Layer w10: D58.3@2704.2,-150.43 2709.13,-150.43 2714.95,-156.26 2714.95,-190.05 2859.23,-334.32 2859.59,-334.32 2872.98,-347.72 D42.3@2877.9,-347.72 2877.9,-377.9 2990,-490 3021.21,-490 3070.83,-539.61 3070.83,-550.82 3072.64,-552.63 3072.64,-572.64 3073.58,-573.58 3075.51,-573.58 IC2.26@3076.42,-574.49
OUTB10: D11.3 D27.3 IC1.17 | length 672.6
  Top Layer w10: D27.3@378.7,-1214.57 410.43,-1214.57 572.5,-1052.5 572.5,-922.5 ; D11.3@523.9,-1017.28 523.9,-971.1 572.5,-922.5 ; IC1.17@656.42,-790.51 656.42,-838.58 572.5,-922.5
OUTB10_1: D43.3 D59.3 IC2.17 | length 672.6
  Top Layer w10: IC2.17@3253.58,-574.49 3253.58,-526.42 3337.5,-442.5 ; D43.3@3386.1,-347.72 3386.1,-393.9 3337.5,-442.5 ; D59.3@3531.3,-150.43 3499.57,-150.43 3337.5,-312.5 3337.5,-442.5
OUTB11: D12.3 D28.3 IC1.11 | length 648.6
  Top Layer w10: D28.3@120,-809.09 229.09,-809.09 280,-860 380,-860 435,-805 435,-753.95 ; D12.3@371.5,-753.95 435,-753.95 ; IC1.11@589.49,-703.9 502.07,-703.9 452.02,-753.95 435,-753.95
OUTB11_1: D44.3 D60.3 IC2.11 | length 648.6
  Top Layer w10: IC2.11@3320.51,-661.1 3407.93,-661.1 3457.98,-611.05 3475,-611.05 ; D44.3@3538.5,-611.05 3475,-611.05 ; D60.3@3790,-555.91 3680.91,-555.91 3630,-505 3530,-505 3475,-560 3475,-611.05
OUTB12: D13.3 D29.3 IC1.29 | length 786.1
  Top Layer w10: IC1.29@900.51,-762.95 977.95,-762.95 1179.25,-964.25 1179.25,-995.04 D13.3@1201.5,-1017.28 1279.29,-1017.28 1476.57,-1214.57 D29.3@1481.5,-1214.57
OUTB12_1: D45.3 D61.3 IC2.29 | length 786.1
  Top Layer w10: D61.3@2428.5,-150.43 2433.43,-150.43 2630.71,-347.72 D45.3@2708.5,-347.72 2730.75,-369.96 2730.75,-400.75 2932.05,-602.05 IC2.29@3009.49,-602.05
OUTB13: D14.3 D30.3 IC1.23 | length 497.4
  Top Layer w10: IC1.23@774.53,-790.51 774.53,-879.53 851.95,-956.95 851.95,-1011.46 863.6,-1023.11 873.81,-1023.11 919.35,-1068.65 919.35,-1208.74 925.18,-1214.57 D30.3@930.1,-1214.57
OUTB13_1: D46.3 D62.3 IC2.23 | length 497.4
  Top Layer w10: D62.3@2979.9,-150.43 2984.82,-150.43 2990.65,-156.26 2990.65,-296.35 3036.19,-341.89 3046.4,-341.89 3052.23,-347.72 3058.05,-353.54 3058.05,-408.05 3135.47,-485.47 IC2.23@3135.47,-574.49
OUTB14: D15.3 D31.3 IC1.20 | length 480.8
  Top Layer w10: D31.3@654.4,-1214.57 654.4,-1150.6 730,-1075 730,-1048.7 713.19,-1031.89 712.82,-1031.89 D15.3@698.22,-1017.28 ; D15.3@693.3,-1017.28 D15.3@698.22,-1017.28 ; IC1.20@715.47,-790.51 715.47,-901.18 704.04,-912.6 704.04,-1011.46 D15.3@698.22,-1017.28
OUTB14_1: D47.3 D63.3 IC2.20 | length 480.8
  Top Layer w10: IC2.20@3194.53,-574.49 3194.53,-463.82 3205.96,-452.4 3205.96,-353.54 D47.3@3211.78,-347.72 ; D47.3@3216.7,-347.72 D47.3@3211.78,-347.72 ; D63.3@3255.6,-150.43 3255.6,-214.4 3180,-290 3180,-316.3 3196.81,-333.11 3197.18,-333.11 D47.3@3211.78,-347.72
OUTB15: D16.3 D32.3 IC1.14 | length 874.8
  Top Layer w10: D32.3@57.01,-1250 61.93,-1250 86.93,-1275 200,-1275 405,-1070 405,-1035 387.28,-1017.28 D16.3@376.42,-1017.28 ; D16.3@371.5,-1017.28 D16.3@376.42,-1017.28 ; IC1.14@589.49,-762.95 567.05,-762.95 382.24,-947.76 382.24,-1011.46 D16.3@376.42,-1017.28
OUTB15_1: D48.3 D64.3 IC2.14 | length 874.8
  Top Layer w10: IC2.14@3320.51,-602.05 3342.95,-602.05 3527.76,-417.24 3527.76,-353.54 D48.3@3533.58,-347.72 ; D48.3@3538.5,-347.72 D48.3@3533.58,-347.72 ; D64.3@3852.99,-115 3848.07,-115 3823.07,-90 3710,-90 3505,-295 3505,-330 3522.72,-347.72 D48.3@3533.58,-347.72
OUTG0: D1.2 D17.2 IC1.44 | length 764.5
  Top Layer w10: IC1.44@853.27,-479.49 854.17,-478.58 854.17,-450.83 937.25,-367.75 997.25,-367.75 1113.11,-251.89 1119.41,-251.89 1133.58,-237.72 D1.2@1138.5,-237.72 1143.43,-237.72 1343.43,-37.72 D17.2@1418.5,-37.72
OUTG0_1: D33.2 D49.2 IC2.44 | length 764.5
  Top Layer w10: D49.2@2491.5,-1327.28 2566.57,-1327.28 2766.57,-1127.28 D33.2@2771.5,-1127.28 2776.42,-1127.28 2790.59,-1113.11 2796.89,-1113.11 2912.75,-997.25 2972.75,-997.25 3055.83,-914.17 3055.83,-886.42 IC2.44@3056.73,-885.51
OUTG1: D2.2 D18.2 IC1.50 | length 513
  Top Layer w10: IC1.50@735.16,-479.49 735.16,-376.51 755,-356.67 755,-265.5 769.83,-250.68 770.62,-250.68 783.58,-237.72 D2.2@788.5,-237.72 793.43,-237.72 799.25,-231.89 799.25,-116.85 865.43,-50.68 866.22,-50.68 879.18,-37.72 D18.2@884.11,-37.72